# EAGLE board opengarden_v1 (EAGLE 6.1)
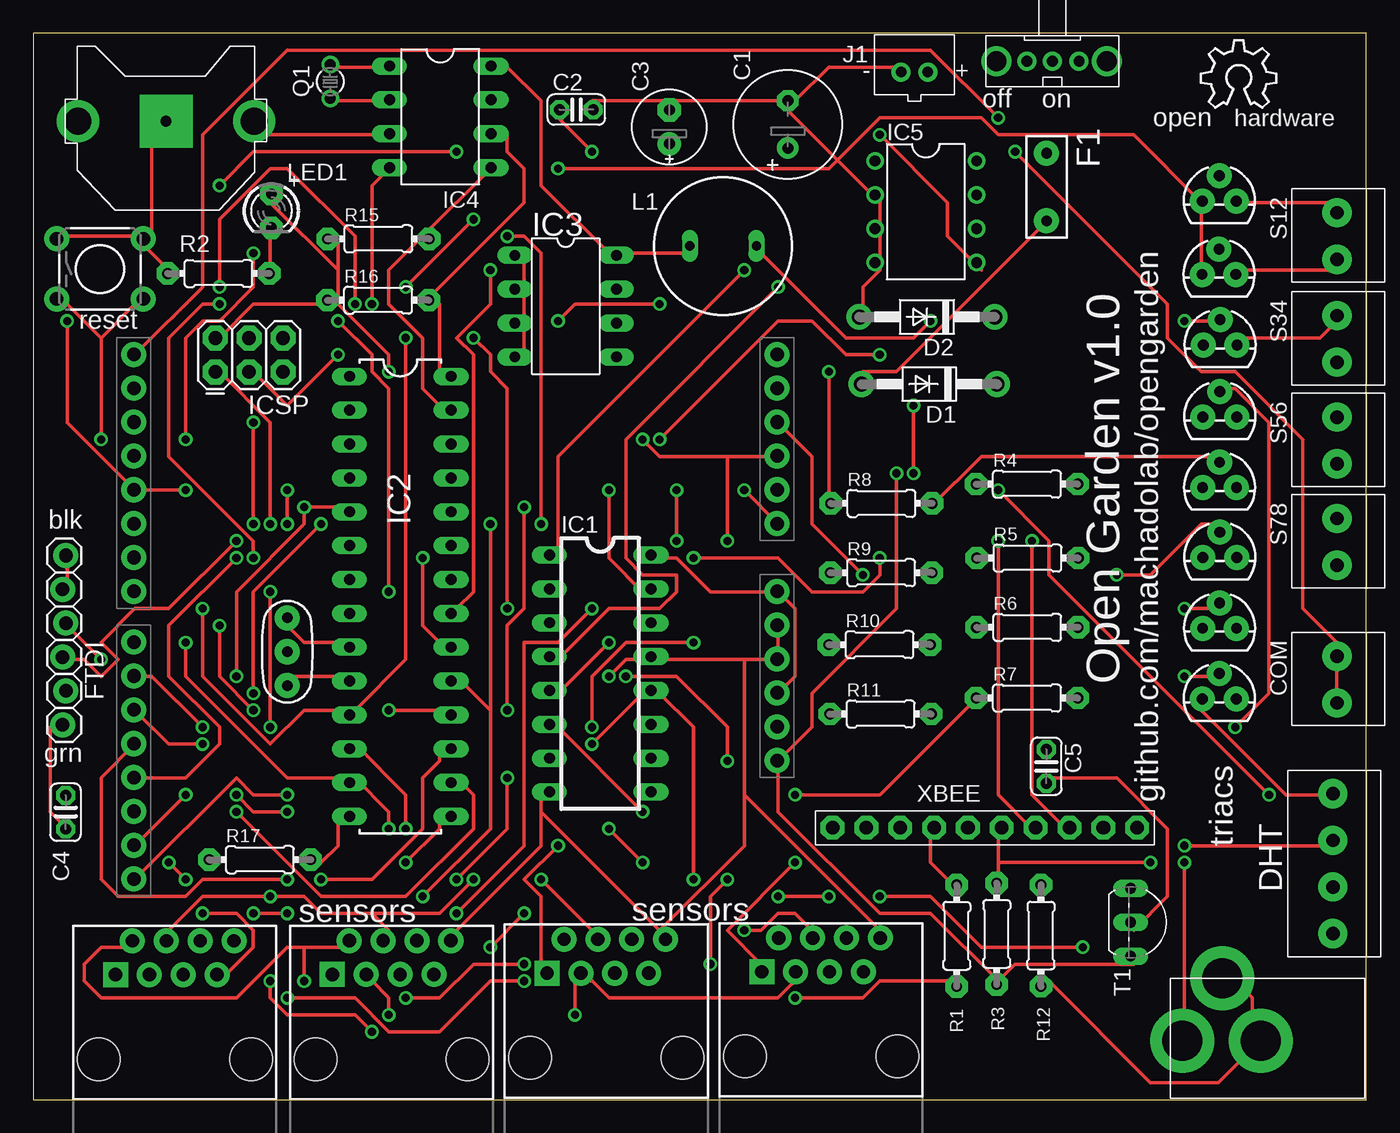
[diagram p0: board, top side]
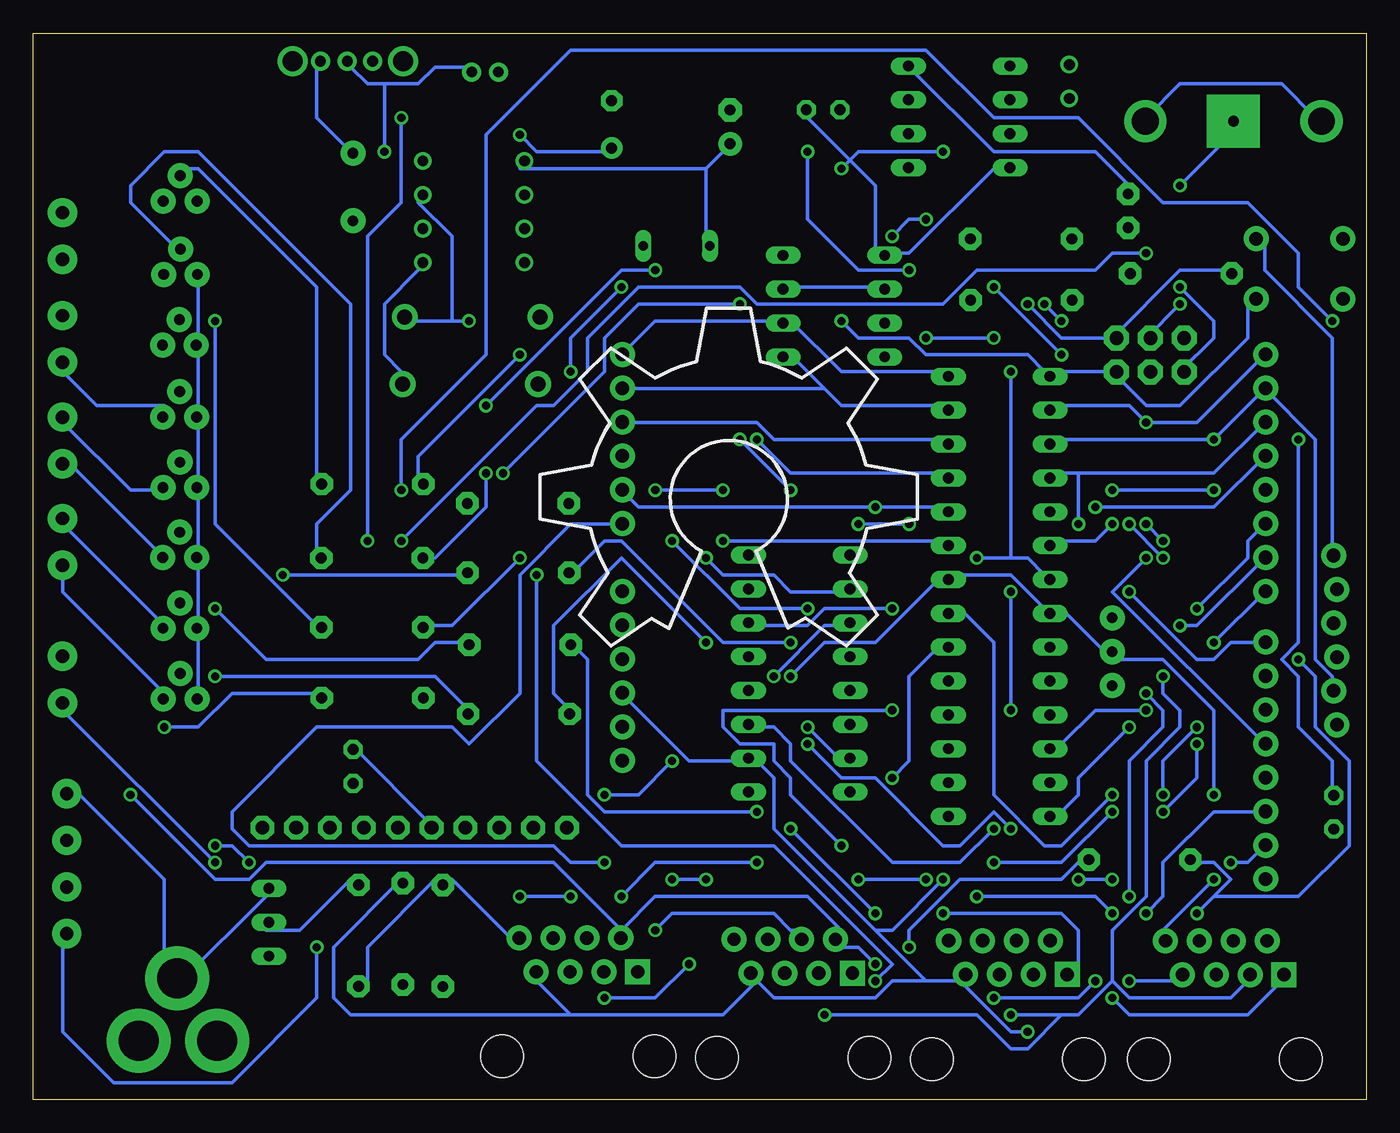
[diagram p1: board, bottom side, seen from below]

Size 100 x 80 mm. Coordinates in mm from the lower left corner, seen from the top.
Outline: 0,0 100,0 100,80 0,80 0,0
Copper layers (1*16): Top 0.035mm / dielectric 1.5mm / Bottom 0.035mm
Design rules: minimum track width 10mil, minimum drill 24mil, track to track 8mil, track to pad 8mil, pad to pad 8mil, via to via 8mil, smd to smd 8mil, copper to edge 40mil, drill to drill 8mil, minimum pad ring 10mil, minimum via ring 8mil, stop-mask expansion 4mil, vias tented up to drill 0mil, thermal gap 10mil

## Footprints (pad centres in the part's own frame; a part is rotated, then mirrored left to right if it is on the bottom)
CR1220-THM = drill 2 pad 3.175: +1 -6.604,0; +2 6.604,0 | drill 0.8 pad 3.962 square: - 0,0
E3,5-8 = drill 0.813 pad 1.6: + -1.778,0 | drill 0.813 pad 1.6 octagon: - 1.778,0
C025-024X044 = drill 0.813 pad 1.422 octagon: 1 -1.27,0; 2 1.27,0
E2,5-6E = drill 0.813 pad 1.778: + -1.27,0 | drill 0.813 pad 1.778 octagon: - 1.27,0
1X04-3.5MM = drill 1 pad 2.184: 1 -5.25,0; 2 -1.75,0; 3 1.75,0; 4 5.25,0
1X2-3.5MM = drill 1 pad 2.184: 1 1.8,0; 2 -1.7,0
DO41-10 = drill 1.118 pad 1.93: A 5.08,0; C -5.08,0
PTC = drill 0.8 pad 1.88: P$1 -2.54,0; P$2 2.54,0
DIL16 = drill 0.813 long: 1 -8.89,-3.81; 2 -6.35,-3.81; 3 -3.81,-3.81; 4 -1.27,-3.81; 5 1.27,-3.81; 6 3.81,-3.81; 7 6.35,-3.81; 8 8.89,-3.81; 9 8.89,3.81; 10 6.35,3.81; 11 3.81,3.81; 12 1.27,3.81; 13 -1.27,3.81; 14 -3.81,3.81; 15 -6.35,3.81; 16 -8.89,3.81
DIL28-3 = drill 0.813 long: 1 -16.51,-3.81; 2 -13.97,-3.81; 3 -11.43,-3.81; 4 -8.89,-3.81; 5 -6.35,-3.81; 6 -3.81,-3.81; 7 -1.27,-3.81; 8 1.27,-3.81; 9 3.81,-3.81; 10 6.35,-3.81; 11 8.89,-3.81; 12 11.43,-3.81; 13 13.97,-3.81; 14 16.51,-3.81; 15 16.51,3.81; 16 13.97,3.81; 17 11.43,3.81; 18 8.89,3.81; 19 6.35,3.81; 20 3.81,3.81; 21 1.27,3.81; 22 -1.27,3.81; 23 -3.81,3.81; 24 -6.35,3.81; 25 -8.89,3.81; 26 -11.43,3.81; 27 -13.97,3.81; 28 -16.51,3.81
DIL8 = drill 0.813 long: 1 -3.81,-3.81; 2 -1.27,-3.81; 3 1.27,-3.81; 4 3.81,-3.81; 5 3.81,3.81; 6 1.27,3.81; 7 -1.27,3.81; 8 -3.81,3.81
DIL08 = drill 0.813 long: 1 -3.81,-3.81; 2 -1.27,-3.81; 3 1.27,-3.81; 4 3.81,-3.81; 5 3.81,3.81; 6 1.27,3.81; 7 -1.27,3.81; 8 -3.81,3.81
DIL08' = drill 0.813 pad 1.27: 1 -3.81,-3.81; 2 -1.27,-3.81; 3 1.27,-3.81; 4 3.81,-3.81; 5 3.81,3.81; 6 1.27,3.81; 7 -1.27,3.81; 8 -3.81,3.81
PJ-102A = drill 3 pad 4.8: RING 0.1,-3.39; RING_SW -4.6,-6.29; TIP 0.1,-9.29
JST-PH-2-THM = drill 0.8 pad 1.422: 1 1,0; 2 -1,0
OS102011MA1Q = drill 0.8 pad 1.422: 1 -2,0; 2 0,0; 3 1.9,0 | drill 1.5 pad 2.184: MT1 -4.1,0; MT2 4.2,0
2X3 = drill 1.016 pad 1.88 octagon: 1 0,0; 2 0,2.54; 3 2.54,0; 4 2.54,2.54; 5 5.08,0; 6 5.08,2.54
RJ45-8 = drill 1 pad 1.88 square: 1 -4.445,6.35 | drill 1 pad 1.88: 2 -3.175,8.89; 3 -1.905,6.35; 4 -0.635,8.89; 5 0.635,6.35; 6 1.905,8.89; 7 3.175,6.35; 8 4.445,8.89 | hole 3.2: -5.715,0; 5.715,0
1X06_LOCK = drill 1.016 pad 1.88: 1 0,0; 2 2.54,-0.254; 3 5.08,0; 4 7.62,-0.254; 5 10.16,0; 6 12.7,-0.254
BS11 = drill 0.7 long: 1 -2.5,0; 2 2.5,0
LED3MM = drill 0.813 pad 1.676 octagon: A -1.27,0; K 1.27,0
TC26V = drill 0.813: 1 -1.27,0; 2 1.27,0
0204/7 = drill 0.813 pad 1.676 octagon: 1 -3.81,0; 2 3.81,0
TACTILE-PTH = drill 1.016 pad 1.88: 1 -3.251,2.261; 2 3.251,2.261; 3 -3.251,-2.261; 4 3.251,-2.261
TO92-EBC-OVAL = drill 0.813 long: B 0,-1.27; C 2.54,-1.27; E -2.54,-1.27
TO-92 = drill 0.813 pad 1.88: 1 -1.27,0; 2 0,1.905; 3 1.27,0
DUEMILANOVE_VIAS = drill 1.016 pad 1.88: 3.3V 50.8,13.97; 5V 50.8,16.51; A0 50.8,29.21; A1 50.8,31.75; A2 50.8,34.29; A3 50.8,36.83; A4 50.8,39.37; A5 50.8,41.91; AREF 2.54,2.54; D2 2.54,36.83; D3 2.54,34.29; D4 2.54,31.75; D5 2.54,29.21; D6 2.54,26.67; D7 2.54,24.13; D8 2.54,20.32; D9 2.54,17.78; D10 2.54,15.24; D11 2.54,12.7; D12 2.54,10.16; D13 2.54,7.62; GND@0 50.8,19.05; GND@1 50.8,21.59; GND@2 2.54,5.08; RES 50.8,11.43; RX 2.54,41.91; TX 2.54,39.37; VIN 50.8,24.13
1X10-BIG = drill 1.016 pad 1.778 octagon: 1 -11.43,0; 2 -8.89,0; 3 -6.35,0; 4 -3.81,0; 5 -1.27,0; 6 1.27,0; 7 3.81,0; 8 6.35,0; 9 8.89,0; 10 11.43,0
RESONATOR-PTH = drill 0.8 pad 1.88: 1 -2.54,0; 2 0,0; 3 2.54,0

## Placement (x,y rotation side)
BAT1  [CR1220-THM]  9.96,73.41 0 top
C1  100u/50v  [E3,5-8]  56.61,73.17 90 top
C2  0.1u  [C025-024X044]  40.74,74.28 0 top
C3  220u  [E2,5-6E]  47.72,72.98 90 top
C4  0.1u  [C025-024X044]  2.42,21.56 90 top
C5  0.1u  [C025-024X044]  76,25 270 top
CN1  [1X04-3.5MM]  97.5,17.7 90 top
COM  1X2-3.5MM  [1X2-3.5MM]  97.81,31.46 90 top
D1  1N4004  [DO41-10]  67.22,53.68 180 top
D2  1N5819  [DO41-10]  67.05,58.72 180 top
F1  PTCPTH  [PTC]  76.02,68.47 90 top
IC1  74HC595N  [DIL16]  42.53,31.96 270 top
IC2  ATMEGA328P  [DIL28-3]  27.53,37.75 270 top
IC3  24LC128P  [DIL8]  39.94,59.53 270 top
IC4  DS1307  [DIL08]  30.53,73.74 270 top
IC5  LM2574N-5.0  [DIL08']  66.96,66.61 270 top
J0  2.1MMJACKTHM  [PJ-102A]  95.49,4.49 270 top
J1  [JST-PH-2-THM]  66.11,77.09 0 top
J2  [OS102011MA1Q]  76.45,77.9 180 top
J3  ISP  [2X3]  13.65,54.59 0 top
J9  RJ45-8PTH  [RJ45-8]  59.1,3.23 0 top
J10  RJ45-8PTH  [RJ45-8]  42.99,3.13 0 top
J11  RJ45-8PTH  [RJ45-8]  26.88,3.03 0 top
J12  RJ45-8PTH  [RJ45-8]  10.61,3.02 0 top
JP1  [1X06_LOCK]  2.19,28.12 90 top
L1  1000uH  [BS11]  51.75,64.04 180 top
LED1  [LED3MM]  17.86,66.68 270 top
Q1  32.768khz  [TC26V]  22.28,76.38 270 top
R1  10k  [0204/7]  69.28,12.29 270 top
R2  1k  [0204/7]  13.89,61.98 0 top
R3  10k  [0204/7]  72.28,12.43 270 top
R4  330  [0204/7]  74.55,46.18 0 top
R5  330  [0204/7]  74.59,40.63 0 top
R6  330  [0204/7]  74.57,35.43 0 top
R7  330  [0204/7]  74.55,30.13 0 top
R8  330  [0204/7]  63.63,44.73 0 top
R9  330  [0204/7]  63.61,39.53 0 top
R10  330  [0204/7]  63.49,34.13 0 top
R11  330  [0204/7]  63.57,28.93 0 top
R12  10k  [0204/7]  75.6,12.3 270 top
R15  4.7k  [0204/7]  25.89,64.58 0 top
R16  4.7k  [0204/7]  25.87,59.98 0 top
R17  10k  [0204/7]  17,18 0 top
S1  [TACTILE-PTH]  5,62.32 0 top
S12  1X2-3.5MM  [1X2-3.5MM]  97.81,64.74 90 top
S34  1X2-3.5MM  [1X2-3.5MM]  97.81,57.02 90 top
S56  1X2-3.5MM  [1X2-3.5MM]  97.81,49.4 90 top
S78  1X2-3.5MM  [1X2-3.5MM]  97.81,41.79 90 top
T1  2N2222  [TO92-EBC-OVAL]  83.6,13.3 270 top
TR1  [TO-92]  88.98,67.41 0 top
TR2  [TO-92]  88.96,61.91 0 top
TR3  [TO-92]  89.04,56.61 0 top
TR4  [TO-92]  89.02,51.21 0 top
TR5  [TO-92]  89,45.91 0 top
TR6  [TO-92]  89.02,40.66 0 top
TR7  [TO-92]  89,35.36 0 top
TR8  [TO-92]  88.98,30.06 0 top
U1  SHIELD_CON  [DUEMILANOVE_VIAS]  5,14 0 top
U$1  [OSHW_10X1000_NOTEXT]  62,34 0 bottom
U$2  [OSHW_8X200_NOTEXT]  87.6,74.4 0 top
XBEE  XBEE  [1X10-BIG]  71.39,20.39 0 top
Y1  16Mhz  [RESONATOR-PTH]  19.06,33.6 270 top

## Library data of the parts
BAT1 C1-C5 CN1 COM D1 D2 IC4 J0 J1 J2 LED1 R1-R12 R15-R17 S12 S34 S56 S78 T1 XBEE = adafruit
F1 = SparkFun-PowerIC
IC1 IC2 = SparkFun-DigitalIC
IC3 = microchip; MF: MICROCHIP; MPN: 24LC128-I/P; OC_FARNELL: 9757929; OC_NEWARK: 12C2007
IC5 = linear
J3 J9-J12 JP1 = SparkFun-Connectors
L1 = inductor-neosid; OC_FARNELL: unknown; OC_NEWARK: unknown
Q1 = crystal; OC_FARNELL: unknown; OC_NEWARK: unknown
S1 = SparkFun-Electromechanical
TR1-TR8 = SparkFun-DiscreteSemi
U1 = SparkFun-Boards
U$1 U$2 = ohw-logo
Y1 = SparkFun-FreqCtrl

## Nets
24VAC: COM.1 COM.2 J0.TIP J1.1 J2.2
ABIT0: IC2.4 J9.4 J10.4 J11.4 J12.4 U1.D2
ABIT1: IC2.5 J9.3 J10.3 J11.3 J12.3 U1.D3
ABIT2: IC2.6 J9.2 J10.2 J11.2 J12.2 U1.D4
AREF: C2.1 IC2.21 U1.AREF
BATT: BAT1.+1 BAT1.+2 IC4.3
DHT1: CN1.1 IC2.14 R17.2 U1.D8
DIO1: IC2.15 U1.D9
DIO2: IC2.16 U1.D10
GND: BAT1.- C1.- C2.2 C3.- CN1.4 D2.A IC1.8 IC1.13 IC2.8 IC2.22 IC3.1 IC3.2 IC3.3 IC3.4 IC3.7 IC4.4 IC5.2 IC5.3 IC5.4 J0.RING J0.RING_SW J1.2 J3.6 J9.8 J10.8 J11.8 J12.8 JP1.5 JP1.6 R1.1 R2.1 R12.2 S1.1 S1.2 T1.E TR1.1 TR2.1 TR3.1 TR4.1 TR5.1 TR6.1 TR7.1 TR8.1 U1.GND@0 U1.GND@1 U1.GND@2 XBEE.4 Y1.2
MA0: IC2.23 J9.1 U1.A0
MA1: IC2.24 J10.1 U1.A1
MA2: IC2.25 J11.1 U1.A2
MA3: IC2.26 J12.1 U1.A3
MISO: IC2.18 J3.1 U1.D12
MOSI: IC2.17 J3.4 U1.D11
N$1: IC4.1 Q1.1
N$2: IC4.2 Q1.2
N$3: IC2.10 Y1.3
N$4: IC2.9 Y1.1
N$5: LED1.K R2.2
N$6: C5.2 R12.1 T1.B
N$7: C4.1 JP1.1
N$8: F1.P$2 J2.1
N$9: D1.A F1.P$1
N$10: C1.+ D1.C IC5.5
N$11: D2.C IC5.7 L1.1
N$12: R4.2 TR1.2
N$13: R5.2 TR2.2
N$14: R6.2 TR3.2
N$15: R7.2 TR4.2
N$16: R8.2 TR5.2
N$17: R9.2 TR6.2
N$18: R10.2 TR7.2
N$19: R11.2 TR8.2
N$20: IC1.15 R4.1
N$21: IC1.1 R5.1
N$22: IC1.2 R6.1
N$23: IC1.3 R7.1
N$24: IC1.4 R8.1
N$25: IC1.5 R9.1
N$26: IC1.6 R10.1
N$27: IC1.7 R11.1
N$29: S12.1 TR1.3
N$30: S34.1 TR3.3
N$31: S56.1 TR5.3
N$32: S78.1 TR7.3
N$33: S78.2 TR8.3
N$34: S56.2 TR6.3
N$35: S34.2 TR4.3
N$36: S12.2 TR2.3
N$51: U1.3.3V
RCK: IC1.12 IC2.13 R1.2 U1.D7
RESET: C4.2 IC2.1 J3.5 R3.2 S1.3 S1.4 T1.C U1.RES
RTS: C5.1 XBEE.5
RXD: IC2.2 JP1.3 U1.RX XBEE.8
SCK: IC2.19 J3.3 U1.D13
SCL: IC2.28 IC3.6 IC4.6 R16.2 U1.A5
SDA: IC2.27 IC3.5 IC4.5 R15.2 U1.A4
SER: IC1.14 IC2.11 U1.D5
SK: IC1.11 IC2.12 U1.D6
SQW: IC4.7
TXD: IC2.3 JP1.2 U1.TX XBEE.7
VCC: C3.+ CN1.3 IC1.10 IC1.16 IC2.7 IC2.20 IC3.8 IC4.8 IC5.1 J3.2 J9.7 J10.7 J11.7 J12.7 JP1.4 L1.2 LED1.A R3.1 R15.1 R16.1 R17.1 U1.5V U1.VIN XBEE.6

## Tracks (layer width: path | path; a pad name or v marks a point on that pad's centre or on a via)
24VAC  (via drill 0.61)
  Top 0.254: COM.2 97.79,30.48 97.79,33.02 COM.1 97.79,34.29 95.25,36.83 95.25,49.53 90.17,54.61 87.63,54.61 85.09,57.15 85.09,59.69 v73.66,71.12 | v86.36,17.78 86.36,5.08 J0.TIP
  Bottom 0.254: 73.66,76.2 74.93,76.2 76.2,77.47 J2.2 | 73.66,76.2 71.12,76.2 69.85,77.47 67.31,77.47 J1.1 | v86.36,17.78 97.79,29.21 COM.2 | v73.66,71.12 73.66,76.2
ABIT0  (via drill 0.61)
  Top 0.254: v53.34,12.7 54.61,12.7 55.88,13.97 57.15,13.97 58.42,12.7 J9.4 | 25.4,13.97 21.59,13.97 20.32,15.24 v17.78,15.24 12.7,15.24 10.16,12.7 J12.4 | 25.4,13.97 26.67,12.7 J11.4 | v38.1,16.51 41.91,12.7 J10.4 | v33.02,16.51 30.48,13.97 25.4,13.97 | v21.59,43.18 16.51,38.1 v16.51,30.48
  Bottom 0.254: 21.59,46.99 11.43,46.99 7.62,50.8 U1.D2 | 21.59,46.99 22.86,46.99 IC2.4 | v53.34,12.7 52.07,13.97 44.45,13.97 43.18,12.7 41.91,12.7 J10.4 | v33.02,16.51 v38.1,16.51 | v21.59,43.18 21.59,46.99 | v16.51,30.48 15.24,29.21 15.24,27.94 17.78,25.4 v17.78,15.24
ABIT1  (via drill 0.61)
  Top 0.254: IC2.5 22.86,44.45 v20.32,44.45 20.32,43.18 15.24,38.1 v15.24,31.75 | 40.64,8.89 41.91,8.89 43.18,7.62 55.88,7.62 57.15,8.89 J9.3 | v26.67,6.35 26.67,7.62 25.4,8.89 J11.3 | v40.64,6.35 40.64,8.89 | 40.64,8.89 J10.3
  Bottom 0.254: v20.32,44.45 11.43,44.45 7.62,48.26 U1.D3 | 19.05,8.89 17.78,7.62 10.16,7.62 8.89,8.89 J12.3 | 19.05,8.89 21.59,6.35 22.86,6.35 | v26.67,6.35 22.86,6.35 | v40.64,6.35 29.21,6.35 26.67,3.81 25.4,3.81 22.86,6.35 | v15.24,31.75 15.24,30.48 13.97,29.21 13.97,27.94 16.51,25.4 16.51,15.24 19.05,12.7 19.05,8.89
ABIT2  (via drill 0.61)
  Top 0.254: v19.05,45.72 v19.05,43.18 | 7.62,45.72 v11.43,45.72 | 20.32,11.43 24.13,11.43 J11.2 | 20.32,11.43 19.05,11.43 15.24,7.62 5.08,7.62 3.81,8.89 3.81,10.16 5.08,11.43 7.62,11.43 J12.2 | v36.83,10.16 33.02,10.16 30.48,7.62 v27.94,7.62 | 20.32,11.43 v20.32,8.89 | 7.62,45.72 2.54,50.8 v2.54,58.42 | v72.39,45.72 76.2,41.91 76.2,39.37 v92.71,22.86 | 7.62,45.72 U1.D4
  Bottom 0.254: v19.05,43.18 20.32,41.91 22.86,41.91 IC2.6 | v11.43,45.72 v19.05,45.72 | 55.88,12.7 53.34,15.24 41.91,15.24 39.37,12.7 J10.2 39.37,11.43 38.1,11.43 v36.83,10.16 | v27.94,7.62 21.59,7.62 v20.32,8.89 | v2.54,58.42 5.08,60.96 5.08,63.5 8.89,67.31 15.24,67.31 21.59,73.66 27.94,73.66 33.02,78.74 59.69,78.74 66.04,72.39 66.04,55.88 72.39,49.53 v72.39,45.72 | v92.71,22.86 86.36,16.51 83.82,16.51 82.55,17.78 60.96,17.78 55.88,12.7 | 55.88,12.7 J9.2
AREF  (via drill 0.61)
  Top 0.254: v19.05,22.86 16.51,22.86 15.24,24.13 7.62,16.51 U1.AREF | v41.91,71.12 39.37,73.66 C2.1 | v34.29,62.23 34.29,59.69 31.75,57.15 33.02,55.88 33.02,38.1 31.75,36.83 IC2.21
  Bottom 0.254: v19.05,22.86 22.86,19.05 24.13,19.05 27.94,22.86 27.94,34.29 30.48,36.83 IC2.21 | v41.91,71.12 41.91,66.04 38.1,62.23 v34.29,62.23
BATT
  Top 0.254: IC4.3 26.67,72.39 17.78,72.39 BAT1.+2
  Bottom 0.254: BAT1.+1 3.81,73.66 6.35,76.2 13.97,76.2 16.51,73.66 BAT1.+2
DHT1  (via drill 0.61)
  Top 0.254: IC2.14 22.86,21.59 22.86,19.05 21.59,17.78 R17.2 | v17.78,27.94 v17.78,38.1 | v78.74,11.43 71.12,11.43 67.31,15.24 v63.5,15.24 | v55.88,15.24 v59.69,15.24 | v43.18,20.32 v45.72,17.78 | v34.29,11.43 v36.83,13.97
  Bottom 0.254: v17.78,38.1 12.7,33.02 11.43,33.02 10.16,34.29 7.62,34.29 U1.D8 | v17.78,27.94 21.59,24.13 21.59,22.86 22.86,21.59 IC2.14 | v78.74,11.43 78.74,7.62 85.09,1.27 93.98,1.27 97.79,5.08 97.79,11.43 CN1.1 | v59.69,15.24 v63.5,15.24 | v55.88,15.24 53.34,17.78 v45.72,17.78 | v36.83,13.97 v43.18,20.32 | v34.29,11.43 34.29,12.7 30.48,16.51 22.86,16.51 21.59,17.78 R17.2
DIO1  (via drill 0.61)
  Top 0.254: v27.94,17.78 30.48,20.32 30.48,21.59 IC2.15 | v19.05,21.59 16.51,21.59 v15.24,22.86 | v12.7,27.94 8.89,31.75 7.62,31.75 U1.D9
  Bottom 0.254: v27.94,17.78 22.86,17.78 v19.05,21.59 | v15.24,22.86 15.24,25.4 v12.7,27.94
DIO2  (via drill 0.61)
  Top 0.254: v15.24,21.59 21.59,15.24 27.94,15.24 33.02,20.32 33.02,22.86 31.75,24.13 IC2.16 | v12.7,26.67 10.16,26.67 7.62,29.21 U1.D10
  Bottom 0.254: v15.24,21.59 12.7,24.13 v12.7,26.67
GND  (via drill 0.61)
  Top 0.254: JP1.5 2.54,38.1 2.54,40.64 JP1.6 | 7.62,64.77 10.16,62.23 R2.1 | 7.62,64.77 2.54,64.77 S1.1 | 7.62,64.77 S1.2 8.89,64.77 8.89,72.39 BAT1.- | 36.83,58.42 36.83,55.88 IC3.4 | 36.83,60.96 36.83,63.5 IC3.1 | 36.83,60.96 36.83,58.42 | 36.83,58.42 IC3.3 | 36.83,60.96 IC3.2 | 63.5,64.77 63.5,62.23 | 63.5,64.77 63.5,67.31 | 63.5,64.77 IC5.3 | 63.5,62.23 62.23,60.96 62.23,58.42 D2.A | 63.5,62.23 IC5.4 | 48.26,74.93 41.91,74.93 C2.2 | J1.2 64.77,77.47 59.69,77.47 57.15,74.93 C1.- 55.88,74.93 | 55.88,74.93 48.26,74.93 | 48.26,74.93 C3.- | 55.88,74.93 63.5,67.31 | 63.5,67.31 IC5.2 | v25.4,59.69 25.4,68.58 26.67,69.85 IC4.4 | J0.RING_SW 90.17,8.89 91.44,7.62 91.44,5.08 J0.RING 91.44,3.81 88.9,1.27 83.82,1.27 76.2,8.89 R12.2 | CN1.4 96.52,22.86 93.98,22.86 87.63,29.21 TR8.1 | 87.63,67.31 87.63,62.23 TR2.1 | v10.16,17.78 v11.43,16.51 | v11.43,22.86 7.62,19.05 U1.GND@2 | XBEE.4 67.31,20.32 67.31,17.78 68.58,16.51 R1.1 | 55.88,33.02 53.34,33.02 | 53.34,33.02 46.99,33.02 IC1.13 45.72,33.02 44.45,33.02 v43.18,31.75 | 55.88,33.02 55.88,35.56 U1.GND@1 | 55.88,33.02 U1.GND@0 | 38.1,21.59 38.1,19.05 31.75,12.7 J11.8 | 38.1,21.59 38.1,22.86 IC1.8 | 38.1,21.59 46.99,12.7 | 53.34,22.86 53.34,19.05 46.99,12.7 | 53.34,22.86 53.34,33.02 | 46.99,12.7 J10.8 | 53.34,22.86 63.5,12.7 J9.8 | v13.97,68.58 16.51,71.12 v31.75,71.12 | v39.37,69.85 59.69,69.85 63.5,73.66 71.12,73.66 72.39,72.39 82.55,72.39 87.63,67.31 | 87.63,67.31 TR1.1
  Bottom 0.254: 19.05,57.15 13.97,62.23 10.16,62.23 R2.1 | JP1.6 2.54,40.64 2.54,57.15 7.62,62.23 7.62,64.77 S1.2 | IC3.7 43.18,60.96 36.83,60.96 IC3.2 | IC4.4 27.94,69.85 34.29,63.5 35.56,63.5 IC3.1 36.83,63.5 36.83,68.58 41.91,73.66 C2.2 | 19.05,57.15 22.86,57.15 v25.4,59.69 | 19.05,57.15 J3.6 | T1.E 82.55,15.24 88.9,8.89 J0.RING_SW 90.17,10.16 90.17,16.51 96.52,22.86 CN1.4 | 87.63,35.56 87.63,30.48 TR8.1 | 87.63,45.72 87.63,50.8 TR4.1 87.63,52.07 87.63,55.88 TR3.1 87.63,57.15 87.63,62.23 TR2.1 | 87.63,45.72 87.63,40.64 | 87.63,45.72 TR5.1 | 87.63,40.64 87.63,35.56 | 87.63,35.56 TR7.1 | 87.63,40.64 TR6.1 | v11.43,16.51 15.24,12.7 J12.8 | v10.16,17.78 8.89,17.78 7.62,19.05 U1.GND@2 | 19.05,33.02 22.86,36.83 IC2.8 24.13,36.83 26.67,39.37 30.48,39.37 IC2.22 31.75,39.37 36.83,34.29 40.64,34.29 v43.18,31.75 | v11.43,22.86 11.43,29.21 15.24,33.02 19.05,33.02 | 19.05,33.02 Y1.2 | J9.8 63.5,11.43 68.58,16.51 R1.1 69.85,16.51 74.93,11.43 74.93,8.89 R12.2 | v13.97,68.58 10.16,72.39 BAT1.- | v31.75,71.12 38.1,71.12 v39.37,69.85
MA0  (via drill 0.61)
  Top 0.254: v48.26,45.72 v48.26,41.91 | v53.34,45.72 55.88,43.18 U1.A0 | v57.15,17.78 52.07,12.7 54.61,10.16 J9.1
  Bottom 0.254: v48.26,41.91 31.75,41.91 IC2.23 | v53.34,45.72 v48.26,45.72 | v57.15,17.78 59.69,17.78 60.96,19.05 83.82,19.05 85.09,20.32 85.09,21.59 78.74,27.94 68.58,27.94 67.31,26.67 63.5,30.48 63.5,39.37 59.69,43.18 55.88,43.18 U1.A0
MA1  (via drill 0.61)
  Top 0.254: v39.37,19.05 36.83,16.51 38.1,15.24 38.1,10.16 J10.1 | v35.56,29.21 35.56,35.56 36.83,36.83 v36.83,44.45
  Bottom 0.254: IC2.24 31.75,44.45 v36.83,44.45 54.61,44.45 55.88,45.72 U1.A1 | v39.37,19.05 43.18,22.86 43.18,24.13 44.45,25.4 44.45,26.67 46.99,26.67 48.26,27.94 48.26,29.21 v35.56,29.21
MA2  (via drill 0.61)
  Top 0.254: v45.72,49.53 46.99,48.26 52.07,48.26 | 52.07,48.26 55.88,48.26 U1.A2 | v31.75,13.97 36.83,19.05 36.83,34.29 39.37,34.29 v41.91,36.83 | 52.07,48.26 v52.07,41.91
  Bottom 0.254: v45.72,49.53 43.18,46.99 31.75,46.99 IC2.25 | v31.75,13.97 22.86,13.97 21.59,12.7 21.59,10.16 J11.1 | v41.91,36.83 46.99,36.83 v52.07,41.91
MA3  (via drill 0.61)
  Top 0.254: v19.05,7.62 24.13,7.62 26.67,5.08 30.48,5.08 34.29,8.89 v36.83,8.89 | v62.23,39.37 58.42,43.18 58.42,48.26 55.88,50.8 U1.A3
  Bottom 0.254: IC2.26 31.75,49.53 44.45,49.53 45.72,50.8 55.88,50.8 U1.A3 | v19.05,7.62 17.78,6.35 8.89,6.35 6.35,8.89 J12.1 | v36.83,8.89 35.56,10.16 44.45,19.05 55.88,19.05 62.23,25.4 v62.23,39.37
MISO  (via drill 0.61)
  Top 0.254: v26.67,29.21 30.48,29.21 IC2.18 | v26.67,38.1 26.67,53.34 25.4,54.61 25.4,55.88 v22.86,58.42 | v24.13,59.69 24.13,64.77 19.05,69.85 17.78,69.85 13.97,66.04 v13.97,60.96 | v15.24,40.64 10.16,35.56 10.16,31.75 13.97,27.94 13.97,26.67 11.43,24.13 7.62,24.13 U1.D12 | v17.78,43.18 17.78,50.8 13.97,54.61 J3.1
  Bottom 0.254: v26.67,38.1 v26.67,29.21 | v24.13,59.69 v22.86,58.42 | v13.97,60.96 11.43,58.42 11.43,57.15 13.97,54.61 J3.1 | v17.78,43.18 v15.24,40.64
MOSI  (via drill 0.61)
  Top 0.254: v21.59,16.51 25.4,16.51 29.21,20.32 29.21,24.13 30.48,25.4 30.48,26.67 IC2.17 | v19.05,16.51 12.7,16.51 11.43,15.24 6.35,15.24 5.08,16.51 5.08,24.13 7.62,26.67 U1.D11 | v13.97,59.69 12.7,59.69 10.16,57.15 10.16,48.26 16.51,41.91 v16.51,40.64
  Bottom 0.254: v19.05,16.51 v21.59,16.51 | v13.97,59.69 16.51,57.15 J3.4 | v16.51,40.64 19.05,38.1 7.62,26.67 U1.D11
N$1
  Top 0.254: Q1.1 22.86,77.47 26.67,77.47 IC4.1
N$2
  Top 0.254: Q1.2 22.86,74.93 26.67,74.93 IC4.2
N$3
  Top 0.254: IC2.10 22.86,31.75 19.05,31.75 Y1.3
N$4
  Top 0.254: IC2.9 22.86,34.29 20.32,34.29 19.05,35.56 Y1.1
N$5
  Top 0.254: R2.2 17.78,62.23 17.78,64.77 LED1.K
N$6
  Top 0.254: C5.2 76.2,24.13 81.28,24.13 85.09,20.32 85.09,15.24 82.55,12.7 T1.B
  Bottom 0.254: T1.B 82.55,12.7 80.01,12.7 76.2,16.51 R12.1
N$7
  Top 0.254: C4.1 2.54,20.32 1.27,21.59 1.27,27.94 JP1.1
N$8
  Bottom 0.254: J2.1 78.74,77.47 78.74,73.66 76.2,71.12 F1.P$2
N$9
  Top 0.254: F1.P$1 76.2,66.04 64.77,54.61 62.23,54.61 D1.A
N$10  (via drill 0.61)
  Top 0.254: v63.5,72.39 68.58,67.31 68.58,64.77 71.12,62.23 IC5.5
  Bottom 0.254: IC5.5 71.12,62.23 73.66,59.69 73.66,55.88 72.39,54.61 D1.C | v63.5,72.39 62.23,71.12 57.15,71.12 C1.+
N$11  (via drill 0.61)
  Top 0.254: v67.31,58.42 66.04,57.15 60.96,57.15 54.61,63.5 L1.1
  Bottom 0.254: 68.58,58.42 72.39,58.42 D2.C | 68.58,58.42 v67.31,58.42 | 68.58,58.42 68.58,64.77 71.12,67.31 IC5.7
N$12
  Bottom 0.254: R4.2 78.74,45.72 78.74,60.96 87.63,69.85 88.9,69.85 TR1.2
N$13
  Bottom 0.254: R5.2 78.74,40.64 78.74,43.18 76.2,45.72 76.2,59.69 87.63,71.12 90.17,71.12 92.71,68.58 92.71,67.31 88.9,63.5 TR2.2
N$14  (via drill 0.61)
  Top 0.254: v86.36,58.42 88.9,58.42 TR3.2
  Bottom 0.254: v86.36,58.42 86.36,43.18 78.74,35.56 R6.2
N$15  (via drill 0.61)
  Top 0.254: v90.17,27.94 92.71,30.48 92.71,50.8 90.17,53.34 88.9,53.34 TR4.2
  Bottom 0.254: v90.17,27.94 87.63,27.94 85.09,30.48 78.74,30.48 R7.2
N$16
  Top 0.254: R8.2 67.31,44.45 71.12,48.26 88.9,48.26 TR5.2
N$17  (via drill 0.61)
  Top 0.254: v81.28,39.37 83.82,39.37 87.63,43.18 88.9,43.18 TR6.2
  Bottom 0.254: v81.28,39.37 67.31,39.37 R9.2
N$18  (via drill 0.61)
  Top 0.254: v86.36,36.83 88.9,36.83 TR7.2
  Bottom 0.254: v86.36,36.83 82.55,33.02 71.12,33.02 69.85,34.29 67.31,34.29 R10.2
N$19  (via drill 0.61)
  Top 0.254: v86.36,31.75 88.9,31.75 TR8.2
  Bottom 0.254: v86.36,31.75 69.85,31.75 67.31,29.21 R11.2
N$20  (via drill 0.61)
  Top 0.254: v43.18,45.72 43.18,40.64 45.72,38.1 IC1.15 | v46.99,49.53 55.88,58.42 58.42,58.42 60.96,55.88 v63.5,55.88
  Bottom 0.254: v46.99,49.53 v43.18,45.72 | v63.5,55.88 71.12,48.26 71.12,45.72 R4.1
N$21  (via drill 0.61)
  Top 0.254: v53.34,62.23 39.37,48.26 39.37,40.64 IC1.1 | v66.04,46.99 v66.04,52.07
  Bottom 0.254: v53.34,62.23 55.88,62.23 v66.04,52.07 | v66.04,46.99 66.04,44.45 69.85,40.64 71.12,40.64 R5.1
N$22  (via drill 0.61)
  Top 0.254: v49.53,40.64 55.88,40.64 58.42,38.1 62.23,38.1 63.5,39.37 v63.5,40.64
  Bottom 0.254: v49.53,40.64 48.26,39.37 44.45,39.37 43.18,38.1 39.37,38.1 IC1.2 | v63.5,40.64 68.58,35.56 71.12,35.56 R6.1
N$23  (via drill 0.61)
  Top 0.254: v44.45,31.75 48.26,31.75 52.07,27.94 v52.07,25.4 | v57.15,22.86 63.5,22.86 71.12,30.48 R7.1
  Bottom 0.254: v44.45,31.75 40.64,35.56 39.37,35.56 IC1.3 | v52.07,25.4 54.61,22.86 v57.15,22.86
N$24  (via drill 0.61)
  Top 0.254: v55.88,60.96 44.45,49.53 44.45,40.64 45.72,39.37 48.26,39.37 48.26,38.1 46.99,36.83 43.18,36.83 39.37,33.02 IC1.4 | v59.69,54.61 59.69,44.45 R8.1
  Bottom 0.254: v55.88,60.96 59.69,57.15 v59.69,54.61
N$25  (via drill 0.61)
  Top 0.254: v43.18,34.29 39.37,30.48 IC1.5
  Bottom 0.254: v43.18,34.29 48.26,34.29 55.88,41.91 57.15,41.91 59.69,39.37 R9.1
N$26  (via drill 0.61)
  Top 0.254: v45.72,21.59 39.37,27.94 IC1.6
  Bottom 0.254: v45.72,21.59 57.15,21.59 58.42,22.86 58.42,33.02 59.69,34.29 R10.1
N$27  (via drill 0.61)
  Top 0.254: v41.91,27.94 41.91,31.75 44.45,34.29 v49.53,34.29
  Bottom 0.254: v41.91,27.94 39.37,25.4 IC1.7 | v49.53,34.29 55.88,40.64 60.96,35.56 60.96,30.48 59.69,29.21 R11.1
N$29
  Top 0.254: TR1.3 90.17,67.31 97.79,67.31 S12.1
N$30
  Top 0.254: TR3.3 90.17,57.15 96.52,57.15 97.79,58.42 S34.1
N$31
  Bottom 0.254: TR5.3 90.17,45.72 92.71,45.72 97.79,50.8 S56.1
N$32
  Bottom 0.254: TR7.3 90.17,35.56 97.79,43.18 S78.1
N$33
  Bottom 0.254: TR8.3 90.17,30.48 97.79,38.1 97.79,39.37 S78.2
N$34
  Bottom 0.254: TR6.3 90.17,40.64 97.79,48.26 S56.2
N$35
  Bottom 0.254: TR4.3 90.17,52.07 95.25,52.07 97.79,54.61 S34.2
N$36
  Top 0.254: TR2.3 90.17,62.23 97.79,62.23 S12.2
RCK  (via drill 0.61)
  Top 0.254: v11.43,34.29 11.43,31.75 19.05,24.13 22.86,24.13 IC2.13 24.13,24.13 26.67,21.59 v26.67,20.32 | v41.91,26.67 45.72,30.48 IC1.12 46.99,30.48 49.53,27.94 v49.53,16.51 | v57.15,7.62 62.23,7.62 63.5,8.89 68.58,8.89 R1.2 | v50.8,10.16 50.8,15.24 v52.07,16.51
  Bottom 0.254: v11.43,34.29 7.62,38.1 U1.D7 | v41.91,26.67 39.37,24.13 36.83,24.13 31.75,19.05 30.48,19.05 27.94,21.59 v26.67,20.32 | v57.15,7.62 53.34,7.62 v50.8,10.16 | v49.53,16.51 v52.07,16.51
RESET  (via drill 0.61)
  Top 0.254: 72.39,8.89 73.66,10.16 82.55,10.16 T1.C | 55.88,25.4 55.88,21.59 63.5,13.97 67.31,13.97 72.39,8.89 | 72.39,8.89 R3.2 | 5.08,57.15 v5.08,49.53 | 5.08,57.15 2.54,59.69 S1.3 | 5.08,57.15 7.62,59.69 S1.4 | 55.88,25.4 58.42,27.94 58.42,30.48 64.77,36.83 v64.77,46.99 | v46.99,59.69 40.64,59.69 v39.37,58.42 | 55.88,25.4 U1.RES
  Bottom 0.254: 19.05,54.61 22.86,54.61 IC2.1 24.13,54.61 25.4,55.88 33.02,55.88 34.29,57.15 38.1,57.15 v39.37,58.42 | v5.08,49.53 5.08,34.29 6.35,33.02 5.08,31.75 5.08,27.94 2.54,25.4 2.54,22.86 C4.2 | 19.05,54.61 16.51,52.07 13.97,52.07 8.89,57.15 8.89,59.69 S1.4 | 19.05,54.61 J3.5 | v64.77,46.99 57.15,54.61 57.15,57.15 54.61,59.69 v46.99,59.69
RTS
  Bottom 0.254: C5.1 76.2,26.67 69.85,20.32 XBEE.5
RXD  (via drill 0.61)
  Top 0.254: v74.93,41.91 74.93,22.86 77.47,20.32 XBEE.8 | v72.39,73.66 67.31,78.74 19.05,78.74 12.7,72.39 12.7,60.96 7.62,55.88 U1.RX | v15.24,41.91 10.16,36.83 7.62,36.83 5.08,34.29 6.35,33.02 5.08,31.75 3.81,33.02 2.54,33.02 JP1.3 | v16.51,50.8 v16.51,43.18
  Bottom 0.254: IC2.2 22.86,52.07 17.78,52.07 v16.51,50.8 12.7,50.8 7.62,55.88 U1.RX | v74.93,41.91 74.93,64.77 72.39,67.31 v72.39,73.66 | v16.51,43.18 v15.24,41.91
SCK  (via drill 0.61)
  Top 0.254: 34.29,29.21 31.75,31.75 IC2.19 | 34.29,29.21 34.29,20.32 v29.21,15.24 | v16.51,13.97 v19.05,13.97 | v22.86,55.88 19.05,52.07 16.51,54.61 J3.3 | v33.02,66.04 v27.94,60.96 | v35.56,64.77 36.83,64.77 38.1,63.5 v38.1,43.18 | 34.29,29.21 v34.29,43.18
  Bottom 0.254: v29.21,15.24 20.32,15.24 v19.05,13.97 | v16.51,13.97 15.24,15.24 15.24,17.78 11.43,21.59 7.62,21.59 U1.D13 | v27.94,60.96 v22.86,55.88 | v33.02,66.04 34.29,66.04 v35.56,64.77 | v34.29,43.18 v38.1,43.18
SCL
  Top 0.254: IC2.28 30.48,54.61 30.48,59.69 R16.2 29.21,59.69 36.83,67.31 36.83,69.85 35.56,71.12 35.56,72.39 IC4.6
  Bottom 0.254: U1.A5 55.88,55.88 53.34,58.42 44.45,58.42 IC3.6 43.18,58.42 39.37,54.61 31.75,54.61 IC2.28
SDA
  Top 0.254: 29.21,64.77 34.29,69.85 IC4.5 | 29.21,64.77 26.67,62.23 26.67,59.69 29.21,57.15 29.21,53.34 30.48,52.07 IC2.27 | 29.21,64.77 R15.2
  Bottom 0.254: 40.64,53.34 43.18,55.88 IC3.5 | 40.64,53.34 39.37,52.07 31.75,52.07 IC2.27 | 40.64,53.34 55.88,53.34 U1.A4
SER  (via drill 0.61)
  Top 0.254: v12.7,36.83 12.7,31.75 17.78,26.67 20.32,29.21 22.86,29.21 IC2.11 24.13,29.21 27.94,33.02 v27.94,57.15 | v35.56,36.83 35.56,53.34 34.29,54.61 34.29,55.88 v33.02,57.15
  Bottom 0.254: v12.7,36.83 8.89,40.64 8.89,41.91 7.62,43.18 U1.D5 | v35.56,36.83 40.64,36.83 41.91,35.56 45.72,35.56 IC1.14 | v27.94,57.15 v33.02,57.15
SK  (via drill 0.61)
  Top 0.254: v27.94,20.32 27.94,22.86 24.13,26.67 IC2.12 | v13.97,35.56 13.97,31.75 v16.51,29.21
  Bottom 0.254: v27.94,20.32 30.48,17.78 35.56,17.78 43.18,25.4 43.18,26.67 44.45,27.94 45.72,27.94 IC1.11 | v13.97,35.56 12.7,35.56 7.62,40.64 U1.D6 | v16.51,29.21 20.32,29.21 22.86,26.67 IC2.12
TXD  (via drill 0.61)
  Top 0.254: v72.39,41.91 72.39,22.86 74.93,20.32 XBEE.7 | v16.51,63.5 16.51,60.96 13.97,58.42 12.7,58.42 11.43,57.15 v11.43,49.53
  Bottom 0.254: 7.62,53.34 v11.43,49.53 22.86,49.53 IC2.3 | v72.39,41.91 62.23,52.07 60.96,52.07 58.42,54.61 58.42,57.15 54.61,60.96 46.99,60.96 45.72,59.69 31.75,59.69 29.21,62.23 20.32,62.23 19.05,63.5 v16.51,63.5 | 7.62,53.34 3.81,49.53 3.81,33.02 2.54,31.75 2.54,30.48 JP1.2 | 7.62,53.34 U1.TX
VCC  (via drill 0.61)
  Top 0.254: L1.2 49.53,63.5 44.45,63.5 IC3.8 43.18,63.5 38.1,68.58 38.1,74.93 35.56,77.47 IC4.8 | v29.21,40.64 29.21,35.56 30.48,34.29 IC2.20 | 22.86,62.23 22.86,64.77 R15.1 | 22.86,62.23 22.86,59.69 | 22.86,62.23 17.78,67.31 LED1.A | J3.2 13.97,57.15 16.51,59.69 21.59,59.69 R16.1 22.86,59.69 | v26.67,54.61 26.67,55.88 22.86,59.69 | v12.7,13.97 15.24,13.97 16.51,12.7 16.51,11.43 13.97,8.89 J12.7 | v5.08,33.02 2.54,35.56 JP1.4 | 72.39,17.78 72.39,20.32 XBEE.6 | 72.39,17.78 72.39,16.51 R3.1 | v86.36,19.05 96.52,19.05 CN1.3 | 72.39,17.78 v83.82,17.78 | 55.88,38.1 50.8,38.1 48.26,40.64 46.99,40.64 IC1.16 | 55.88,38.1 57.15,36.83 57.15,31.75 55.88,30.48 U1.5V | 55.88,38.1 U1.VIN | v17.78,8.89 17.78,7.62 19.05,6.35 24.13,6.35 v25.4,5.08 | v35.56,24.13 35.56,20.32 v31.75,16.51
  Bottom 0.254: 49.53,69.85 63.5,69.85 IC5.1 | 49.53,69.85 48.26,71.12 C3.+ | 49.53,69.85 49.53,64.77 L1.2 | 26.67,40.64 25.4,40.64 24.13,39.37 IC2.7 | 26.67,40.64 v29.21,40.64 | v26.67,54.61 26.67,40.64 | IC4.8 34.29,77.47 27.94,71.12 20.32,71.12 17.78,68.58 LED1.A | v12.7,13.97 11.43,15.24 | 11.43,15.24 10.16,16.51 11.43,17.78 12.7,17.78 R17.1 | v5.08,33.02 3.81,31.75 3.81,27.94 1.27,25.4 1.27,19.05 5.08,15.24 11.43,15.24 | v86.36,19.05 85.09,19.05 v83.82,17.78 | U1.5V 55.88,30.48 50.8,25.4 46.99,25.4 IC1.10 45.72,25.4 44.45,24.13 44.45,20.32 36.83,12.7 | 33.02,8.89 35.56,8.89 36.83,7.62 44.45,7.62 45.72,8.89 | 33.02,8.89 30.48,8.89 | 59.69,6.35 62.23,8.89 J9.7 | 59.69,6.35 48.26,6.35 45.72,8.89 | 45.72,8.89 J10.7 | 33.02,8.89 36.83,12.7 | 59.69,6.35 76.2,6.35 77.47,7.62 77.47,11.43 72.39,16.51 R3.1 | v17.78,8.89 13.97,8.89 J12.7 | v25.4,5.08 26.67,5.08 30.48,8.89 | 30.48,8.89 J11.7 | v35.56,24.13 34.29,25.4 34.29,31.75 31.75,34.29 IC2.20 | v31.75,16.51 35.56,12.7 36.83,12.7

## Text on the board
tPlace: off on | open | hardware | reset | ICSP | blk | Open Garden v1.0 | FTDI | grn | github.com/machadolab/opengarden | triacs
tNames: DHT | sensors | sensors